# EAGLE board usbDirectController4 (EAGLE 9.4.0)
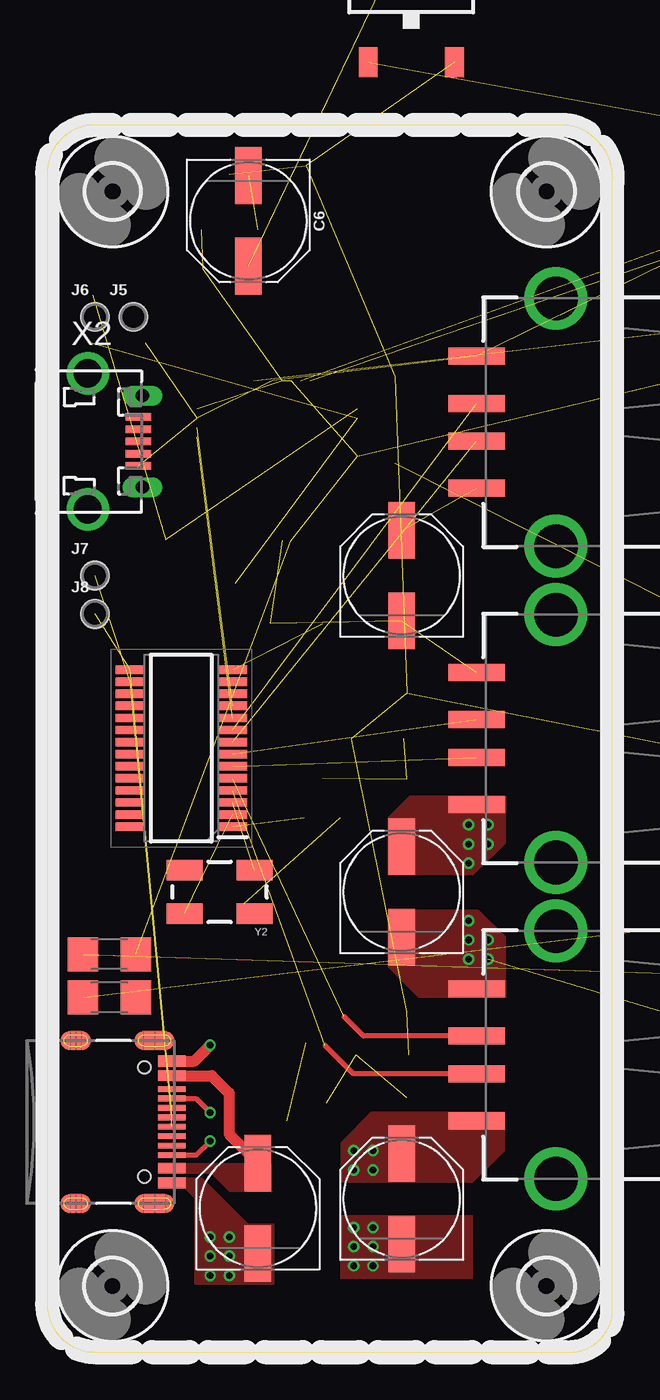
[diagram p0: board, top side]
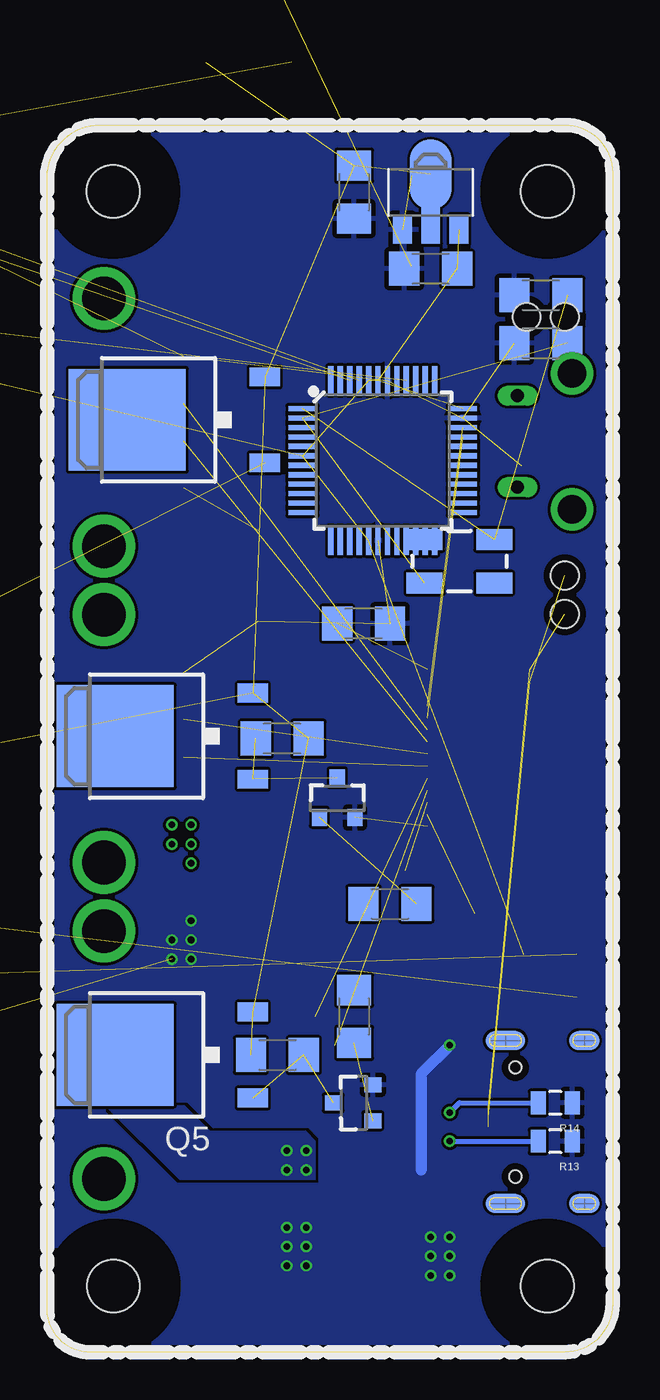
[diagram p1: board, bottom side, seen from below]

Size 29.98 x 65.04 mm. Coordinates in mm from the lower left corner, seen from the top.
Outline: 0,2.55 arc90 2.54,0.01 27.43,0.01 arc90 29.97,2.05 29.97,61.99 arc90 27.43,65.04 2.54,65.04 arc90 0,62.5 0,2.55
Copper layers (1*16): Top 0.035559375mm / dielectric 1.6mm / Bottom 0.035559375mm
Design rules "oshpark-2layer": minimum track width 6mil, minimum drill 10mil, track to track 6mil, track to pad 6mil, pad to pad 6mil, via to via 6mil, smd to smd 6mil, copper to edge 15mil, drill to drill 6mil, minimum pad ring 5mil, minimum via ring 5mil, stop-mask expansion 2.5mil, vias tented up to drill 0mil, thermal gap 10mil
Net classes: 0 default: width 0.254 mm, clearance 0.152 mm; 1 power: width 0.381 mm, clearance 0.254 mm; 2 hub_power: width 0.584 mm, clearance 0.254 mm; 3 usbsignal: width 0.254 mm, clearance 0.203 mm

## Footprints (pad centres in the part's own frame; a part is rotated, then mirrored left to right if it is on the bottom)
PANASONIC_D = smd 3 x 1.4: + 2.4,0; - -2.4,0
1206 = smd 1.6 x 1.8: 1 -1.4,0; 2 1.4,0
WS2812B = smd 1.651 x 1: 1 -2.577,1.6; 2 -2.577,-1.6; 3 2.577,-1.6; 4 2.577,1.6
2,8 = hole 2.8: 0,0
SOT89 = smd 1 x 1.5: 1 -1.499,-1.981; 3 1.499,-1.981 | smd 1 x 2: 2 0,-1.727 | smd 2.2 x 3.7: 2@1 0,0.94
SOP64P600X175-28N = smd 1.525 x 0.44: 1 -2.712,4.16; 2 -2.712,3.52; 3 -2.712,2.88; 4 -2.712,2.24; 5 -2.712,1.6; 6 -2.712,0.96; 7 -2.712,0.32; 8 -2.712,-0.32; 9 -2.712,-0.96; 10 -2.712,-1.6; 11 -2.712,-2.24; 12 -2.712,-2.88; 13 -2.712,-3.52; 14 -2.712,-4.16; 15 2.712,-4.16; 16 2.712,-3.52; 17 2.712,-2.88; 18 2.712,-2.24; 19 2.712,-1.6; 20 2.712,-0.96; 21 2.712,-0.32; 22 2.712,0.32; 23 2.712,0.96; 24 2.712,1.6; 25 2.712,2.24; 26 2.712,2.88; 27 2.712,3.52; 28 2.712,4.16
USB-C-16P = smd 0.3 x 1.45: A5 -1.25,0; A6 -0.25,0; A7 0.25,0; A8 1.25,0; B5 1.75,0; B6 0.75,0; B7 -0.75,0; B8 -1.75,0 | smd 0.6 x 1.45: GND -3.225,0; GND2 3.225,0 | smd 1 x 2.1: SHLD1 -4.32,-0.915; SHLD2 4.32,-0.915 | smd 1 x 2.1 bottom: SHLD3 -4.32,-0.915; SHLD4 4.32,-0.915 | smd 1 x 1.6: SHLD5 -4.32,-5.095; SHLD8 4.32,-5.095 | smd 1 x 1.6 bottom: SHLD6 -4.32,-5.095; SHLD7 4.32,-5.095 | smd 0.55 x 1.45: VBUS1 -2.45,0; VBUS2 2.45,0 | hole 0.65: -2.89,-1.445; 2.89,-1.445
1X04 = drill 1.016 pad 1.88: 1 0,0; 2 2.54,0; 3 5.08,0; 4 7.62,0
1X01_POGOPIN_HOLE_0.58_DIA = drill 0.9 pad 0.813: 1 0,0 | hole 1.473: 0,0
TO252 = smd 1 x 1.6: 1 -2.28,-4.8; 2 2.28,-4.8 | smd 5.4 x 6.2: 3 0,2.5
SOT23-3 = smd 0.8 x 0.9: 1 -0.95,-1; 2 0.95,-1; 3 0,1.1
0805 = smd 0.8 x 1.2: 1 -0.9,0; 2 0.9,0
TACTILE-PTH = drill 1.016 pad 1.88: 1 -3.251,2.261; 2 3.251,2.261; 3 -3.251,-2.261; 4 3.251,-2.261
TQFP-48 = smd 1.5 x 0.28: 1 -4.25,2.75; 2 -4.25,2.25; 3 -4.25,1.75; 4 -4.25,1.25; 5 -4.25,0.75; 6 -4.25,0.25; 7 -4.25,-0.25; 8 -4.25,-0.75; 9 -4.25,-1.25; 10 -4.25,-1.75; 11 -4.25,-2.25; 12 -4.25,-2.75; 25 4.25,-2.75; 26 4.25,-2.25; 27 4.25,-1.75; 28 4.25,-1.25; 29 4.25,-0.75; 30 4.25,-0.25; 31 4.25,0.25; 32 4.25,0.75; 33 4.25,1.25; 34 4.25,1.75; 35 4.25,2.25; 36 4.25,2.75 | smd 0.28 x 1.5: 13 -2.75,-4.25; 14 -2.25,-4.25; 15 -1.75,-4.25; 16 -1.25,-4.25; 17 -0.75,-4.25; 18 -0.25,-4.25; 19 0.25,-4.25; 20 0.75,-4.25; 21 1.25,-4.25; 22 1.75,-4.25; 23 2.25,-4.25; 24 2.75,-4.25; 37 2.75,4.25; 38 2.25,4.25; 39 1.75,4.25; 40 1.25,4.25; 41 0.75,4.25; 42 0.25,4.25; 43 -0.25,4.25; 44 -0.75,4.25; 45 -1.25,4.25; 46 -1.75,4.25; 47 -2.25,4.25; 48 -2.75,4.25
NANOFIT2 = drill 1.2 pad 2.1: P$1 10.38,1.3; P$2 10.38,-1.3 | hole 1.7: 3.2,1.25; 3.2,-1.25
USB-A-S-SILK-FEMALE = smd 3 x 0.9: D+ 7.212,-1; D- 7.212,1; GND 7.212,-3.5; VBUS 7.212,3.5 | drill 2.311: SHLD1 3,-6.566; SHLD2 3,6.566
ZX62D-B-5PA8 = smd 1.35 x 0.4: 1 4.825,1.3; 2 4.825,0.65; 3 4.825,0; 4 4.825,-0.65; 5 4.825,-1.3 | drill 1.5: S1 2.15,-3.6; S2 2.15,3.6 | drill 0.7 long: S3 5.05,2.425; S4 5.05,-2.425
CRYSTAL-SMD-5X3 = smd 1.9 x 1.1: 1 -1.85,-1.15; 2 1.85,-1.15; 3 1.85,1.15; 4 -1.85,1.15

## Placement (x,y rotation side)
C1  100uF  [PANASONIC_D]  18.8,24.4 90 top
C2  100uF  [PANASONIC_D]  18.8,8.14 90 top
C3  100uF  [PANASONIC_D]  11.18,7.63 90 top
C4  22pF  [1206]  3.81,56.02 0 bottom
C5  22pF  [1206]  3.81,53.48 0 bottom
C6  100uF  [PANASONIC_D]  10.67,59.96 270 top
C7  1.0uF  [1206]  13.72,61.48 270 bottom
C8  1.0uF  [1206]  9.65,57.42 180 bottom
C9  100uF  [PANASONIC_D]  18.8,41.16 90 top
D2  [WS2812B]  45.21,25.29 180 top  (outside the outline)
H1  MOUNT-HOLE2.8  [2,8]  26.47,3.52 0 top
H2  MOUNT-HOLE2.8  [2,8]  26.48,61.52 0 top
H3  MOUNT-HOLE2.8  [2,8]  3.47,3.51 0 top
H4  MOUNT-HOLE2.8  [2,8]  3.47,61.51 0 top
IC1  MCP170312MB  [SOT89]  9.65,61.48 0 bottom
IC3  FE1.1S  [SOP64P600X175-28N]  7.11,32.02 180 top
J1  [USB-C-16P]  6.6,12.21 270 top
J2  [1X04]  46.74,64.53 0 top  (outside the outline)
J5  [1X01_POGOPIN_HOLE_0.58_DIA]  4.57,54.88 0 top
J6  [1X01_POGOPIN_HOLE_0.58_DIA]  2.54,54.88 0 top
J7  [1X01_POGOPIN_HOLE_0.58_DIA]  2.54,41.16 0 top
J8  [1X01_POGOPIN_HOLE_0.58_DIA]  2.54,39.13 0 top
Q1  [TO252]  23.88,32.65 90 bottom
Q2  200mA/50V  [SOT23-3]  14.61,29.35 0 bottom
Q3  [TO252]  23.24,49.42 90 bottom
Q4  200mA/50V  [SOT23-3]  74.68,13.09 180 top  (outside the outline)
Q5  [TO252]  23.88,15.76 90 bottom
Q6  200mA/50V  [SOT23-3]  13.72,13.22 90 bottom
Q7  [TO252]  19.3,73.17 0 top  (outside the outline)
Q8  200mA/50V  [SOT23-3]  93.47,53.35 0 top  (outside the outline)
R4  10k  [1206]  54.61,28.21 0 top  (outside the outline)
R5  [1206]  3.3,21.1 180 top
R6  1k  [1206]  85.34,11.7 270 top  (outside the outline)
R7  10k  [1206]  17.78,15.76 0 bottom
R8  1k  [1206]  13.72,17.79 270 bottom
R9  10k  [1206]  17.53,32.53 180 bottom
R10  1k  [1206]  11.81,23.76 0 bottom
R11  10k  [1206]  99.06,53.35 180 top  (outside the outline)
R12  1k  [1206]  92.46,48.78 90 top  (outside the outline)
R13  5.1k  [0805]  3.05,11.19 180 bottom
R14  5.1k  [0805]  3.05,13.22 180 bottom
R_LED  4.7k  [1206]  3.3,18.81 180 top
REXT  2.7k  [1206]  13.21,38.62 180 bottom
RRST1  [1206]  50.29,55.89 0 top  (outside the outline)
S1  TAC_SWITCHSMD  [TACTILE-PTH]  45.09,17.54 180 top  (outside the outline)
U1  ATSAMD21G-A  [TQFP-48]  12.19,47.26 0 bottom
U$4  NANOFIT2  [NANOFIT2]  60.45,3.06 90 top  (outside the outline)
USB_1  USB_A_SMT_FEMALE  [USB-A-S-SILK-FEMALE]  29.97,49.29 180 top
USB_2  USB_A_SMT_FEMALE  [USB-A-S-SILK-FEMALE]  29.97,32.53 180 top
USB_3  USB_A_SMT_FEMALE  [USB-A-S-SILK-FEMALE]  29.97,15.76 180 top
X2  ZX62D-B-5PA8  [ZX62D-B-5PA8]  0,48.27 0 top
Y1  [CRYSTAL-SMD-5X3]  8.13,41.92 0 bottom
Y2  32.768  [CRYSTAL-SMD-5X3]  9.14,24.4 180 top

## Library data of the parts
C1-C3 C6 C9 = SparkFun-Capacitors; PROD_ID: CAP-12547
C4 C5 R5 R13 R14 REXT RRST1 = SparkFun-Passives
C7 C8 = SparkFun-Capacitors; PROD_ID: CAP-09822
D2 = SparkFun-LED; PROD_ID: DIO-12503
H1-H4 = holes
IC1 = linear
IC3 = FE1.1S; DESCRIPTION: USB 2.0 HIGH SPEED 4-PORT HUB CONTROLLER; HEIGHT: 1.75mm; MANUFACTURER_NAME: JFD IC; MANUFACTURER_PART_NUMBER: FE1.1S
J1 = SparkFun-Connectors; PROD_ID: CONN-14122
J2 = SparkFun-Connectors; PROD_ID: CONN-09696
J5-J8 = SparkFun-Connectors
Q1 Q3 Q5 Q7 = transistor-fet
Q2 Q4 Q6 Q8 = SparkFun-DiscreteSemi; PROD_ID: TRANS-00830
R4 R6-R12 R_LED = SparkFun-Resistors
S1 = SparkFun-Retired
U1 = SparkFun-IC-Microcontroller; PROD_ID: IC-13064
U$4 = volzolib
USB_1-USB_3 = SparkFun-Connectors; PROD_ID: CONN-09520; SF_ID: PRT-09011
X2 = zx62d-b-5pa8-oshpark_10; MF: Hirose; MPN: ZX62D-B-5PA8; OC_FARNELL: 2300438; OC_NEWARK: 69W0712
Y1 Y2 = SparkFun-FreqCtrl; PROD_ID: XTAL-08218

## Nets
BATT_VCC [hub_power]: U$4.P$2
BTN: R5.2 S1.4
CC1: J1.A5 R14.2
CC2: J1.B5 R13.2
CONV_5V [power]: IC3.20
GND: C1.- C2.- C3.- C4.1 C5.1 C6.- C7.2 C8.2 C9.- D2.3 IC1.1 IC3.1 J1.GND J1.GND2 J2.1 Q2.2 Q4.2 Q6.2 Q8.2 R13.1 R14.1 REXT.1 S1.2 U1.18 U1.35 U1.42 U$4.P$1 USB_1.GND USB_2.GND USB_3.GND X2.5
HUB1: C9.+ USB_1.VBUS
HUB2: C1.+ USB_2.VBUS
HUB3: C2.+ USB_3.VBUS
HUB_1 [power]: Q3.3
HUB_1_EN: R6.1
HUB_2 [hub_power]: Q1.3
HUB_2_EN: R10.1
HUB_3 [power]: Q5.3
HUB_3_EN: R8.1
HUB_ZERO [hub_power]: C6.+ Q7.3
HUB_ZERO_EN: R12.1
LED: R_LED.1
MICRO_DM: X2.2
MICRO_DP: X2.3
MICRO_ID: X2.4
MICRO_VBUS: X2.1
N$1: Q1.1 Q2.3 R9.2
N$2: Q4.1 R6.2
N$3: Q3.1 Q4.3 R4.2
N$6: Q2.1 R10.2
N$7: D2.4 R_LED.2
N$8: C4.2 U1.1 Y1.3
N$12: Q5.1 Q6.3 R7.2
N$13: Q6.1 R8.2
N$15: Q7.1 Q8.3 R11.2
N$19: Q8.1 R12.2
N$21: RRST1.1 U1.40
N$23: IC3.3 Y2.1
N$24: IC3.2 Y2.3
N$31: IC3.14 REXT.2
N$32: C5.2 U1.2 Y1.1
SHLD: J1.SHLD1 J1.SHLD2 J1.SHLD3 J1.SHLD4 J1.SHLD5 J1.SHLD6 J1.SHLD7 J1.SHLD8
SWDCLK: J2.2 U1.45
SWDIO: J2.3 U1.46
UC_DM: IC3.10 U1.33
UC_DP: IC3.11 U1.34
USB_1_DM: IC3.8 USB_1.D-
USB_1_DP: IC3.9 USB_1.D+
USB_2_DM: IC3.6 USB_2.D-
USB_2_DP: IC3.7 USB_2.D+
USB_3_DM: IC3.4 USB_3.D-
USB_3_DP: IC3.5 USB_3.D+
USB_5V: C3.+ J1.VBUS1 J1.VBUS2
VCC [power]: C8.1 D2.1 IC1.3 J2.4 R5.1 RRST1.2 U1.6 U1.17 U1.36 U1.43 U1.44
VCC_5V [power]: C7.1 IC1.2@1 Q1.2 Q3.2 Q5.2 Q7.2 R4.1 R7.1 R9.1 R11.1
ZERO_DM: IC3.15 J1.A7 J1.B7 J8.1
ZERO_DP: IC3.16 J1.A6 J1.B6 J7.1

## Tracks (layer width: path | path; a pad name or v marks a point on that pad's centre or on a via)
BTN  (1 unrouted)
CC1  (via drill 0.35)
  Top 0.254: J1.A5 7.89,13.46 v8.64,12.71
  Bottom 0.254: v8.64,12.71 8.13,13.22 R14.2
CC2  (via drill 0.35)
  Top 0.254: J1.B5 7.9,10.46 v8.64,11.19
  Bottom 0.254: v8.64,11.19 R13.2
GND  (via drill 0.35)  (15 unrouted)
  Top 0.584: J1.GND 7.8,15.43 v8.64,16.27
  Top 0.61: C3.- 11.04,5.23
  Bottom 0.584: v8.64,16.27 10.16,14.75 10.16,9.67
  other vias: 16.26,6.62 16.26,5.6 16.26,4.59 17.27,6.62 17.27,5.6 17.27,4.59 23.37,20.84 22.35,20.84 22.35,21.86 23.37,21.86 22.35,22.87 8.64,6.11 8.64,5.09 8.64,4.08 9.65,4.08 9.65,5.09 9.65,6.11
  pour Bottom (rank 2): 29.84,0.01 0,0.01 0,65.04 17.56,65.18 29.84,65.04
  pour Top (no thermals): 11.99,3.6 7.85,3.6 7.85,8.17 7.32,8.7 5.97,8.7 5.94,8.73 5.94,9.26 8.18,9.26 10.62,6.82 11.99,6.82
  pour Top (no thermals): 22.56,3.9 15.57,3.9 15.57,7.25 22.56,7.25
  pour Top (no thermals): 24.28,18.81 19.71,18.81 18.08,20.44 18.08,23.46 22.83,23.46 24.28,22.01
HUB1  (1 unrouted)
HUB2  (via drill 0.35)
  other vias: 22.35,25.92 22.35,26.94 22.35,27.95 23.37,26.94 23.37,27.95
  pour Top (no thermals): 24.28,29.45 24.28,28.51 24.28,26.99 22.58,25.29 18.08,25.29 18.08,28.28 18.06,28.31 19.23,29.48 24.28,29.48
HUB3  (via drill 0.35)
  other vias: 17.27,10.68 16.26,9.67 17.27,9.67 16.26,10.68
  pour Top (no thermals): 15.57,9.03 22.58,9.03 24.26,10.71 24.26,12.69 24.23,12.71 17.17,12.71 15.57,11.11
  pour Bottom (no thermals): 23.29,13.88 29.44,13.88 29.49,13.83 29.49,13.09 26.9,13.09 22.96,9.16 15.75,9.16 15.75,11.19 16.26,11.7 21.34,11.7 22.71,13.07 23.32,13.07 23.32,13.86
HUB_ZERO  (1 unrouted)
N$1  (2 unrouted)
N$2  (1 unrouted)
N$3  (2 unrouted)
N$6  (1 unrouted)
N$7  (1 unrouted)
N$8  (2 unrouted)
N$12  (2 unrouted)
N$13  (1 unrouted)
N$15  (2 unrouted)
N$19  (1 unrouted)
N$21  (1 unrouted)
N$23  (1 unrouted)
N$24  (1 unrouted)
N$31  (1 unrouted)
N$32  (2 unrouted)
SWDCLK  (1 unrouted)
SWDIO  (1 unrouted)
UC_DM  (1 unrouted)
UC_DP  (1 unrouted)
USB_1_DM  (1 unrouted)
USB_1_DP  (1 unrouted)
USB_2_DM  (1 unrouted)
USB_2_DP  (1 unrouted)
USB_3_DM  (1 unrouted)
  Top 0.254: USB_3.D- 16.24,14.76 14.73,16.27
USB_3_DP  (1 unrouted)
  Top 0.254: USB_3.D+ 16.78,16.76 15.75,17.79
USB_5V
  Top 0.584: J1.VBUS1 8.73,14.66 9.65,13.73 9.65,11.56 C3.+
  pour Top (no thermals): 5.92,9.51 8.69,9.51 9.68,8.52 11.86,8.52 11.89,8.5 11.89,10 5.92,10
VCC  (10 unrouted)
VCC_5V  (9 unrouted)
ZERO_DM  (3 unrouted)
ZERO_DP  (2 unrouted)

## Text on the board
tPlace: - | + | TIME | BOX | 12